# EAGLE board 18650_1S3P (EAGLE 9.4.2)
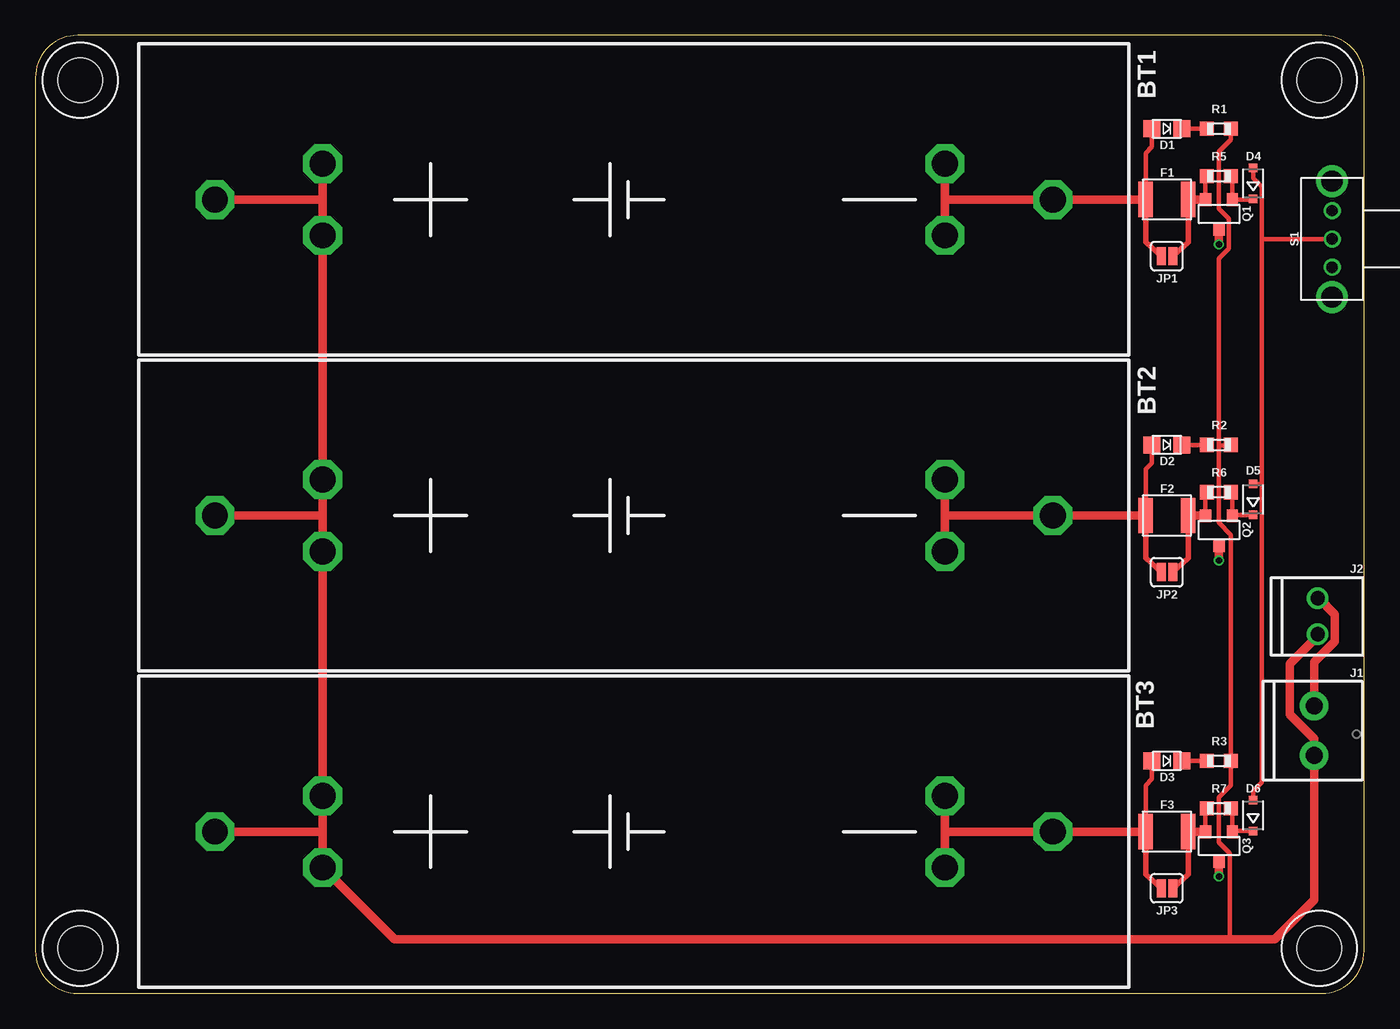
[diagram p0: board, top side]
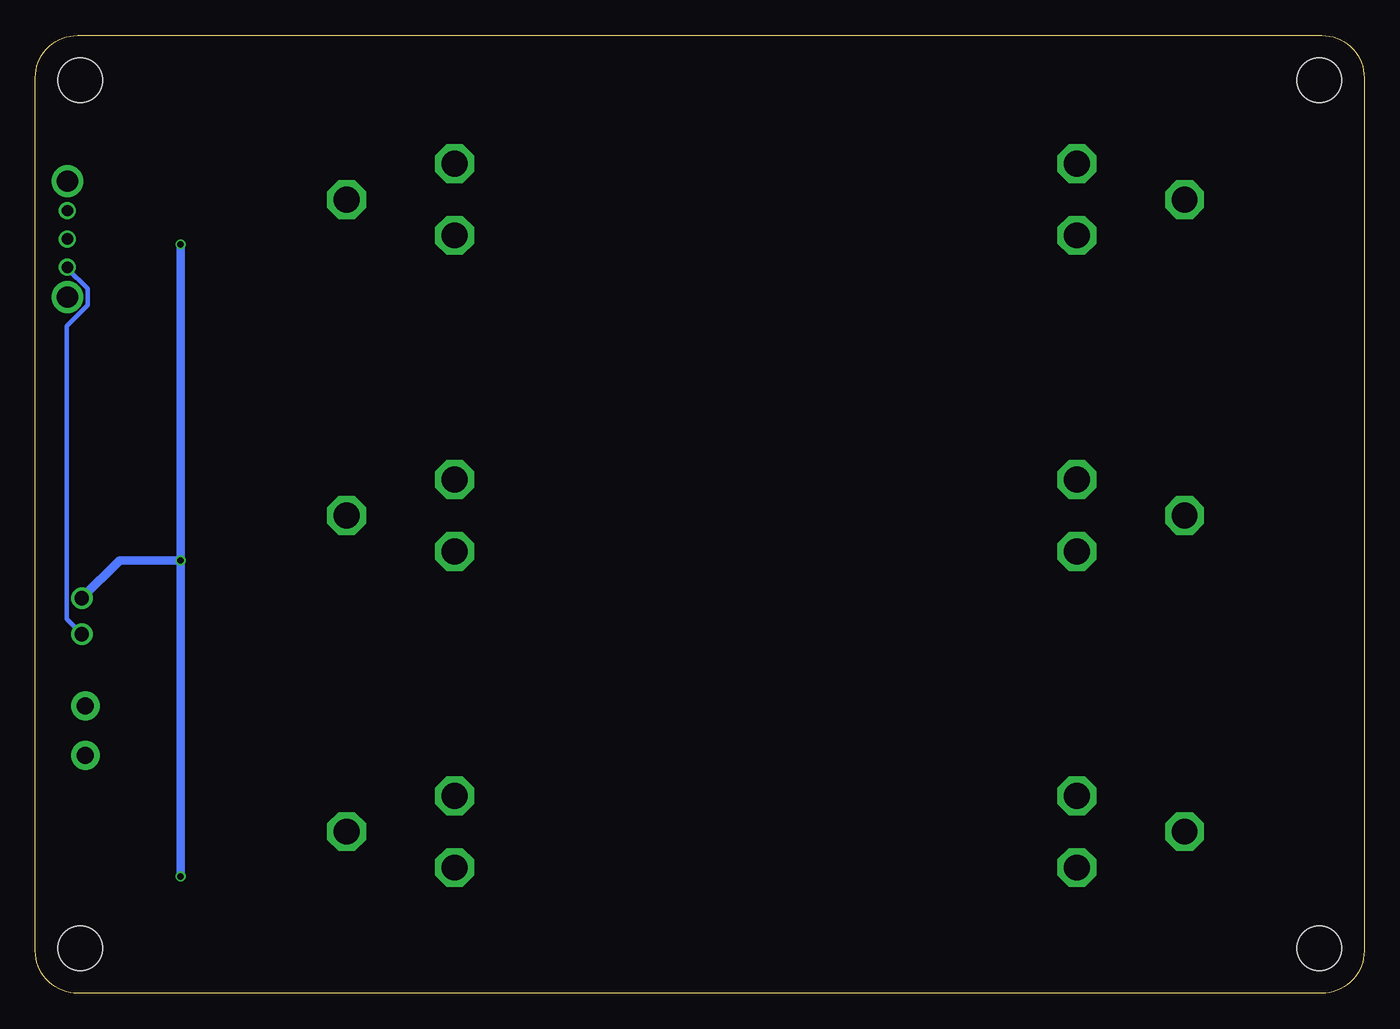
[diagram p1: board, bottom side, seen from below]

Size 93.96 x 67.74 mm. Coordinates in mm from the lower left corner, seen from the top.
Outline: 0,64.74 0,3 arc90 3,0 90.96,0 arc90 93.96,3 93.96,64.74 arc90 90.96,67.74 3,67.74 arc90 0,64.74
Copper layers (1*16): Top 0.035559375mm / dielectric 1.6mm / Bottom 0.035559375mm
Design rules "oshpark-2layer": minimum track width 6mil, minimum drill 10mil, track to track 6mil, track to pad 6mil, pad to pad 6mil, via to via 6mil, smd to smd 6mil, copper to edge 15mil, drill to drill 6mil, minimum pad ring 5mil, minimum via ring 5mil, stop-mask expansion 2.5mil, vias tented up to drill 0mil, thermal gap 10mil

## Footprints (pad centres in the part's own frame; a part is rotated, then mirrored left to right if it is on the bottom)
BATT_18650_CLIP = drill 1.83 octagon: BATT+@1 0,0; BATT+@2 7.62,2.54; BATT+@3 7.62,-2.54; BATT-@1 59.246,0; BATT-@2 51.626,2.54; BATT-@3 51.626,-2.54
LED_0805 = smd 1.2 x 1.2: ANODE 1.05,0; CATHODE -1.05,0
SOD323-R = smd 0.6 x 0.6: A 1.1,0; C -1.1,0
1210_BOURNS = smd 1 x 2.5: 1 -1.5,0; 2 1.5,0
4_40 = hole 3.175: 0,0
SCREWTERMINAL-3.5MM-2_ROUND_RESTRICT = drill 1.2 pad 2.032: 1 0,0; 2 3.5,0
1X02_2.54_SCREWTERM_ROUND = drill 1.016: P1 1.27,0; P2 -1.27,0
SMT-JUMPER_2_NO_SILK = smd 0.635 x 1.27: 1 -0.406,0; 2 0.406,0
SOT23-3 = smd 0.8 x 0.9: 1 -0.95,-1; 2 0.95,-1; 3 0,1.1
R0603 = smd 1 x 1: 1 -0.85,0; 2 0.85,0
OS102011MA1QN1 = drill 0.8: 1 -2,0; 2 0,0; 3 2,0 | drill 1.5: BODY@1 -4.1,0; BODY@2 4.1,0

## Placement (x,y rotation side)
BT1  18650NO_PROTEC  [BATT_18650_CLIP]  12.7,56.13 0 top
BT2  18650NO_PROTEC  [BATT_18650_CLIP]  12.7,33.78 0 top
BT3  18650NO_PROTEC  [BATT_18650_CLIP]  12.7,11.43 0 top
D1  LED0805  [LED_0805]  80.01,61.13 180 top
D2  LED0805  [LED_0805]  80.01,38.78 180 top
D3  LED0805  [LED_0805]  80.01,16.43 180 top
D4  1N4148  [SOD323-R]  86.11,57.28 90 top
D5  1N4148  [SOD323-R]  86.11,34.92 90 top
D6  1N4148  [SOD323-R]  86.11,12.57 90 top
F1  1.75A  [1210_BOURNS]  80.01,56.13 0 top
F2  1.75A  [1210_BOURNS]  80.01,33.78 0 top
F3  1.75A  [1210_BOURNS]  80.01,11.43 0 top
H1  [4_40]  3.17,3.17 0 top
H2  [4_40]  3.17,64.57 0 top
H3  [4_40]  90.78,3.17 0 top
H4  [4_40]  90.78,64.57 0 top
J1  [SCREWTERMINAL-3.5MM-2_ROUND_RESTRICT]  90.42,20.32 270 top
J2  [1X02_2.54_SCREWTERM_ROUND]  90.68,26.67 90 top
JP1  JUMPER-SMT_2_NO_SILK  [SMT-JUMPER_2_NO_SILK]  80.01,52.13 0 top
JP2  JUMPER-SMT_2_NO_SILK  [SMT-JUMPER_2_NO_SILK]  80.01,29.78 0 top
JP3  JUMPER-SMT_2_NO_SILK  [SMT-JUMPER_2_NO_SILK]  80.01,7.43 0 top
Q1  DMG3404  [SOT23-3]  83.69,55.12 180 top
Q2  DMG3404  [SOT23-3]  83.69,32.77 180 top
Q3  DMG3404  [SOT23-3]  83.69,10.41 180 top
R1  4.7k  [R0603]  83.69,61.13 0 top
R2  4.7k  [R0603]  83.69,38.78 0 top
R3  4.7k  [R0603]  83.69,16.43 0 top
R5  100k  [R0603]  83.69,57.78 0 top
R6  100k  [R0603]  83.69,35.43 0 top
R7  100k  [R0603]  83.69,13.08 0 top
S1  SPDTOS1020_RT  [OS102011MA1QN1]  91.69,53.34 90 top

## Library data of the parts
BT1-BT3 = bschulz; DIGIKEY: 36-54-ND; MF: Keystone; MPN: 54
D1-D3 = bschulz; DIGIKEY: 475-1278-1-ND; MF: OSRAM; MPN: LS R976-NR-1
D4-D6 = bschulz; DIGIKEY: 1N4148WTDICT-ND; MF: Diodes Inc; MPN: 1N4148WT-7
F1-F3 = bschulz; DIGIKEY: MF-USMF175X-2CT-ND; MF: Bourns; MPN: MF-USMF175X-2
H1-H4 = bschulz
J1 = bschulz; DIGIKEY: ED2635-ND; MF: On Shore; MPN: OSTTE020161
J2 = bschulz; DIGIKEY: ED10561-ND; MF: OnShore; MPN: OSTVN02A150
JP1-JP3 = SparkFun-Jumpers
Q1-Q3 = bschulz; DIGIKEY: DMG3404L-7DICT-ND; MF: Diodes Incorporated; MPN: DMG3404L-7
R1-R3 = bschulz_passives; DIGIKEY: 311-4.70KHRCT-ND; MF: Yageo; MPN: RC0603FR-074K7L; VALUE_PART: 4.7k
R5-R7 = bschulz_passives; DIGIKEY: 311-100KHRCT-ND; MF: Yageo; MPN: RC0603FR-07100KL; VALUE_PART: 100k
S1 = bschulz; DIGIKEY: CKN9559-ND; MF: C&K; MPN: OS102011MA1QN1

## Nets
BAT1-: BT1.BATT-@1 BT1.BATT-@2 BT1.BATT-@3 D1.ANODE F1.1 JP1.1
BAT2-: BT2.BATT-@1 BT2.BATT-@2 BT2.BATT-@3 D2.ANODE F2.1 JP2.1
BAT3-: BT3.BATT-@1 BT3.BATT-@2 BT3.BATT-@3 D3.ANODE F3.1 JP3.1
GATE: D4.A D5.A D6.A S1.2
N$1: D2.CATHODE R2.1
N$2: D1.CATHODE R1.1
N$3: F1.2 JP1.2 Q1.2 R5.1
N$4: F2.2 JP2.2 Q2.2 R6.1
N$5: D3.CATHODE R3.1
N$6: F3.2 JP3.2 Q3.2 R7.1
N$9: D5.C Q2.1 R6.2
N$10: D4.C Q1.1 R5.2
N$11: D6.C Q3.1 R7.2
SYS+: BT1.BATT+@1 BT1.BATT+@2 BT1.BATT+@3 BT2.BATT+@1 BT2.BATT+@2 BT2.BATT+@3 BT3.BATT+@1 BT3.BATT+@2 BT3.BATT+@3 J1.2 J2.P2 R1.2 R2.2 R3.2 S1.1
SYS-: J1.1 J2.P1 Q1.3 Q2.3 Q3.3

## Tracks (layer width: path | path; a pad name or v marks a point on that pad's centre or on a via)
BAT1-
  Top 0.305: F1.1 78.51,59.41 78.96,59.86 D1.ANODE
  Top 0.406: JP1.1 78.51,53.13 F1.1
  Top 0.61: F1.1 BT1.BATT-@1 64.33,56.13 | BT1.BATT-@2 64.33,56.13 | 64.33,56.13 BT1.BATT-@3
BAT2-
  Top 0.305: F2.1 78.51,37.06 78.96,37.51 D2.ANODE
  Top 0.406: JP2.1 78.51,30.77 F2.1
  Top 0.61: F2.1 BT2.BATT-@1 64.33,33.78 | BT2.BATT-@3 64.33,33.78 | 64.33,33.78 BT2.BATT-@2
BAT3-
  Top 0.305: F3.1 78.51,11.68 78.51,14.71 78.96,15.16 D3.ANODE
  Top 0.406: JP3.1 78.51,8.42 78.51,11.68
  Top 0.61: F3.1 BT3.BATT-@1 64.33,11.43 | BT3.BATT-@2 64.33,11.43 | 64.33,11.43 BT3.BATT-@3
GATE
  Top 0.305: D4.A 86.11,57.66 86.71,57.05 86.71,53.34 | 86.71,53.34 86.71,36.07 | 86.71,36.07 86.71,14.91 86.11,14.31 D6.A | D5.A 86.67,36.02 86.71,36.07 | S1.2 86.71,53.34
N$1
  Top 0.305: D2.CATHODE R2.1
N$2
  Top 0.305: D1.CATHODE R1.1
N$3
  Top 0.305: R5.1 82.74,57.69 Q1.2
  Top 0.406: JP1.2 81.51,53.13 F1.2
  Top 0.61: Q1.2 81.53,56.12 F1.2
N$4
  Top 0.305: R6.1 82.74,35.33 Q2.2
  Top 0.406: JP2.2 81.51,30.77 F2.2
  Top 0.61: Q2.2 82.73,33.78 F2.2
N$5
  Top 0.305: D3.CATHODE R3.1
N$6
  Top 0.305: R7.1 82.74,12.98 Q3.2
  Top 0.406: JP3.2 81.51,8.42 F3.2
  Top 0.61: Q3.2 81.53,11.41 F3.2
N$9
  Top 0.305: R6.2 84.64,35.33 Q2.1 84.7,33.83 D5.C
N$10
  Top 0.305: R5.2 84.64,57.69 Q1.1 86.05,56.12 D4.C
N$11
  Top 0.305: D6.C 84.7,11.47 Q3.1 84.64,12.98 R7.2
SYS+
  Top 0.305: 84.69,38.93 R2.2 84.5,38.73 83.69,38.73 | 83.69,38.73 83.69,33.27 84.54,32.42 R3.2 84.54,14.69 83.69,13.84 83.69,10.67 84.45,9.91 84.45,3.81 | 83.69,38.73 83.69,51.94 84.4,52.65 84.4,54.79 83.69,55.5 83.69,59.52 84.54,60.37 R1.2
  Top 0.61: J2.P2 90.68,25.26 88.7,23.28 88.7,19.71 90.42,17.98 J1.2 90.42,6.6 87.63,3.81 84.45,3.81 25.4,3.81 BT3.BATT+@3 20.32,11.43 | BT1.BATT+@2 20.32,56.13 | 20.32,56.13 BT1.BATT+@3 BT2.BATT+@2 20.32,33.78 | BT1.BATT+@1 20.32,56.13 | 20.32,33.78 BT2.BATT+@3 BT3.BATT+@2 20.32,11.43 | BT2.BATT+@1 20.32,33.78 | BT3.BATT+@1 20.32,11.43
  Bottom 0.305: S1.1 91.69,51.26 90.26,49.83 90.26,48.65 91.74,47.17 91.74,26.47 J2.P2
SYS-  (via drill 0.45)
  Top 0.61: J1.1 90.42,23.42 91.9,24.89 91.9,26.79 90.75,27.94 J2.P1 | Q1.3 v83.69,52.96 | v83.69,30.61 Q2.3 | v83.69,8.26 Q3.3
  Bottom 0.61: v83.69,52.96 v83.69,30.61 | v83.69,30.61 v83.69,8.26 | J2.P1 88.01,30.61 v83.69,30.61

## Text on the board
tDocu: OFF | ON | - | + | - | + | Vout | 1S3P - 18650 / Project Gonk / Bobby Schulz / v0.1